# Altium PCB 5_step_seq.PcbDoc
Units mm, origin at the board's own origin, x right, y up, seen from the top; angles counter-clockwise.
Board outline 69.8 x 106.5 mm, 2 copper layers (Top Layer, Bottom Layer); 89 components, 66 nets, 253 pads, 244 vias.
Unrouted connection lines stored in the file: 39.
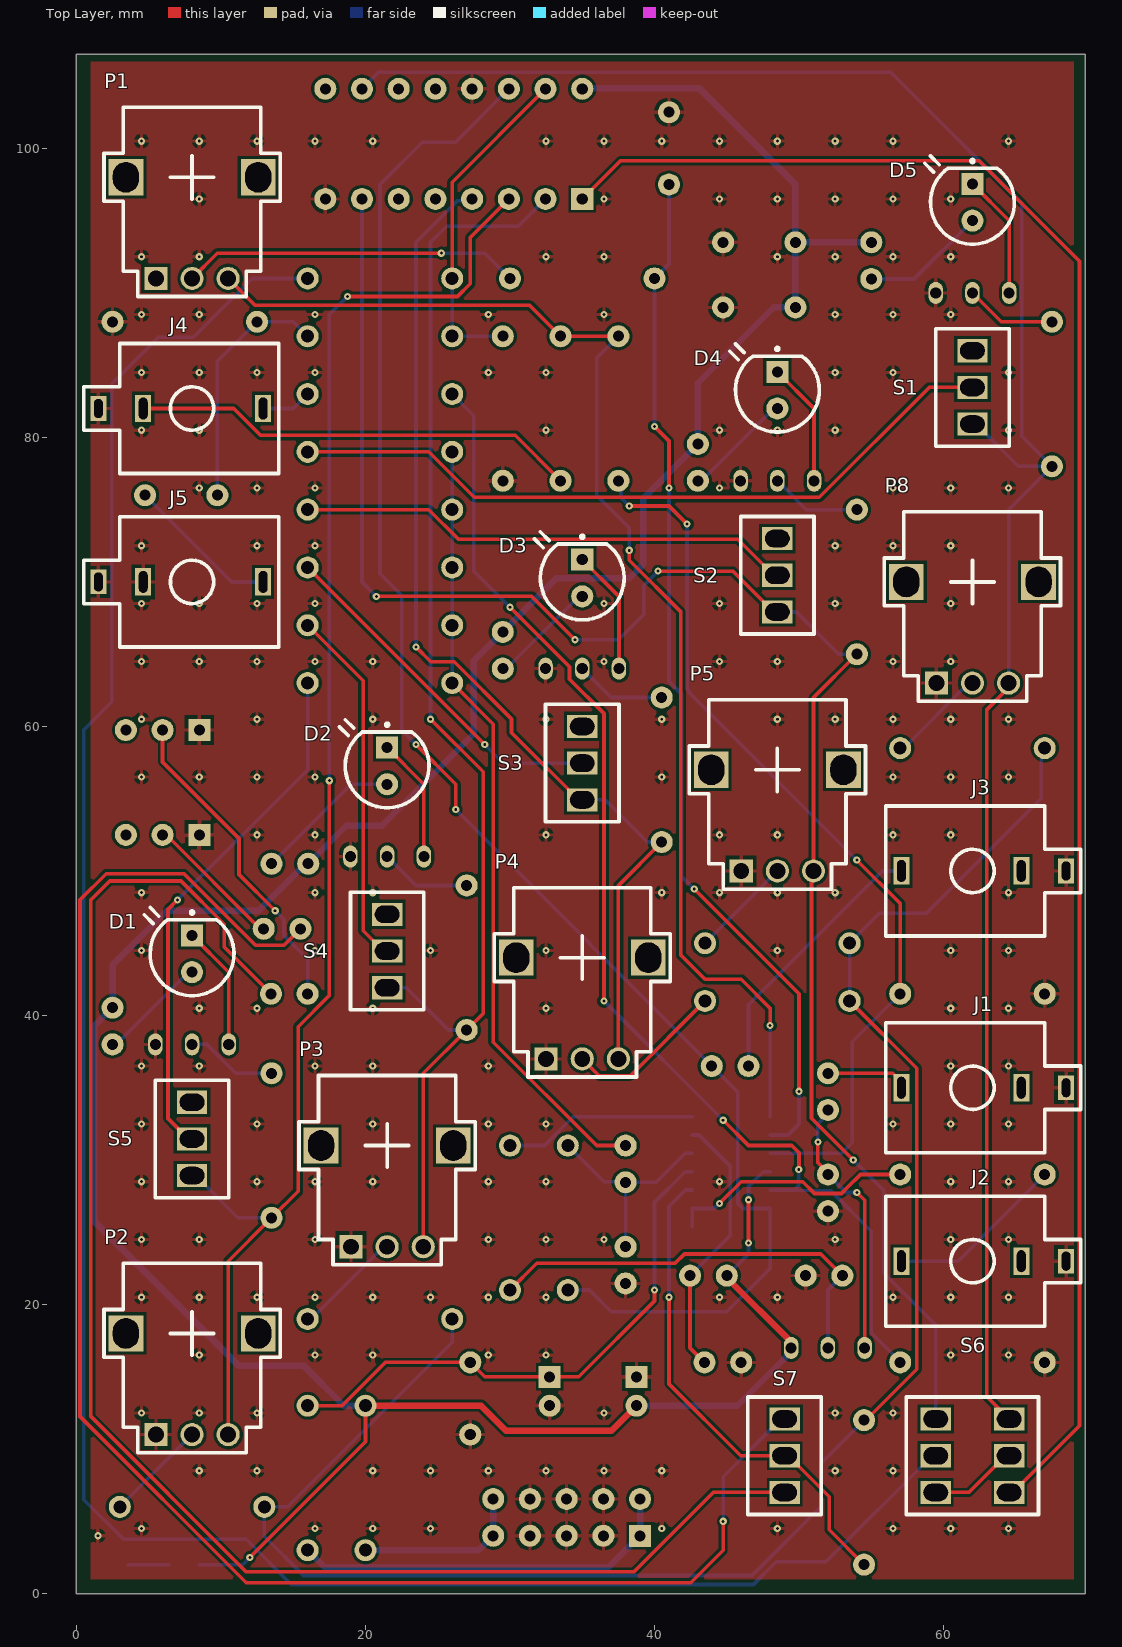
[diagram p0: Top Layer view]
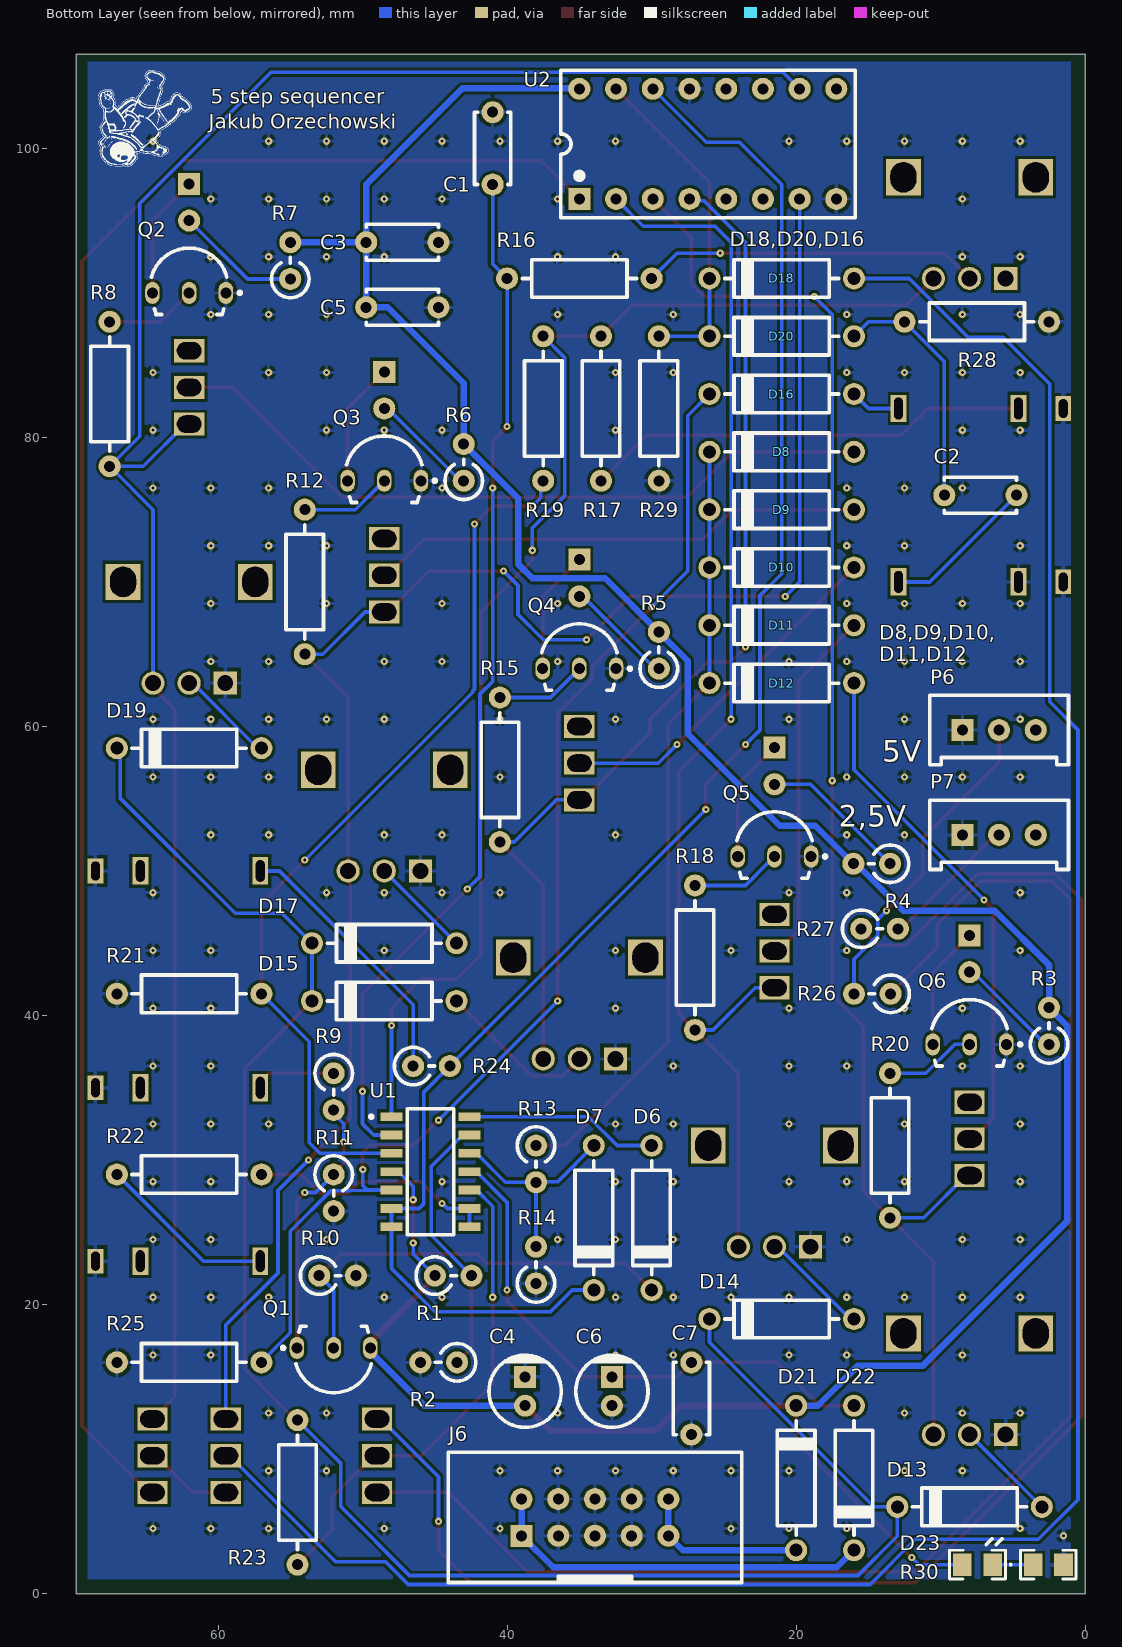
[diagram p1: Bottom Layer view, seen from below]
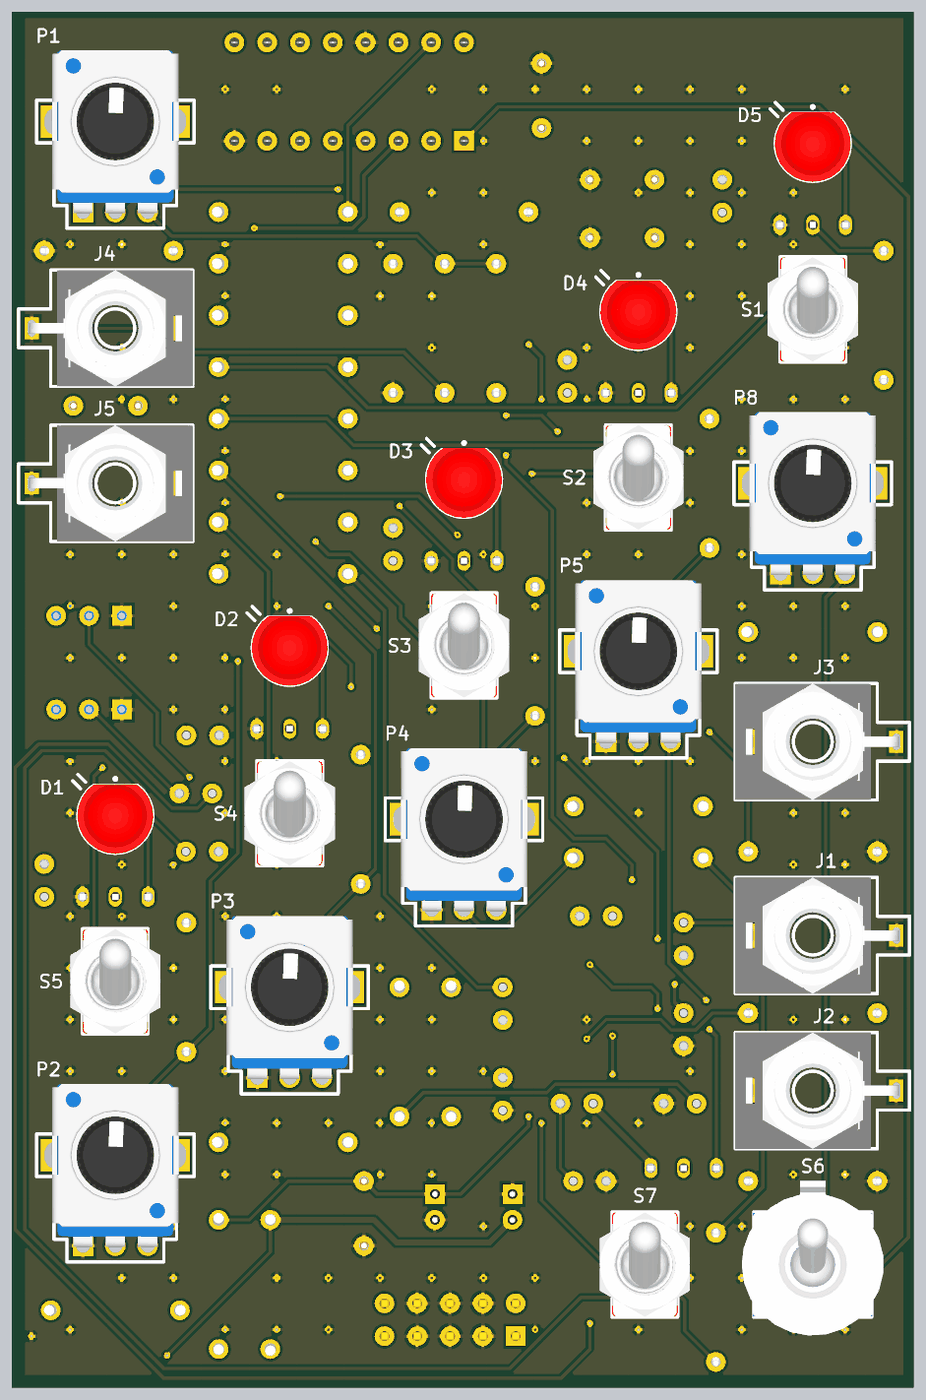
[diagram p2: 3D render of the assembled board from above, using the file's embedded part models]
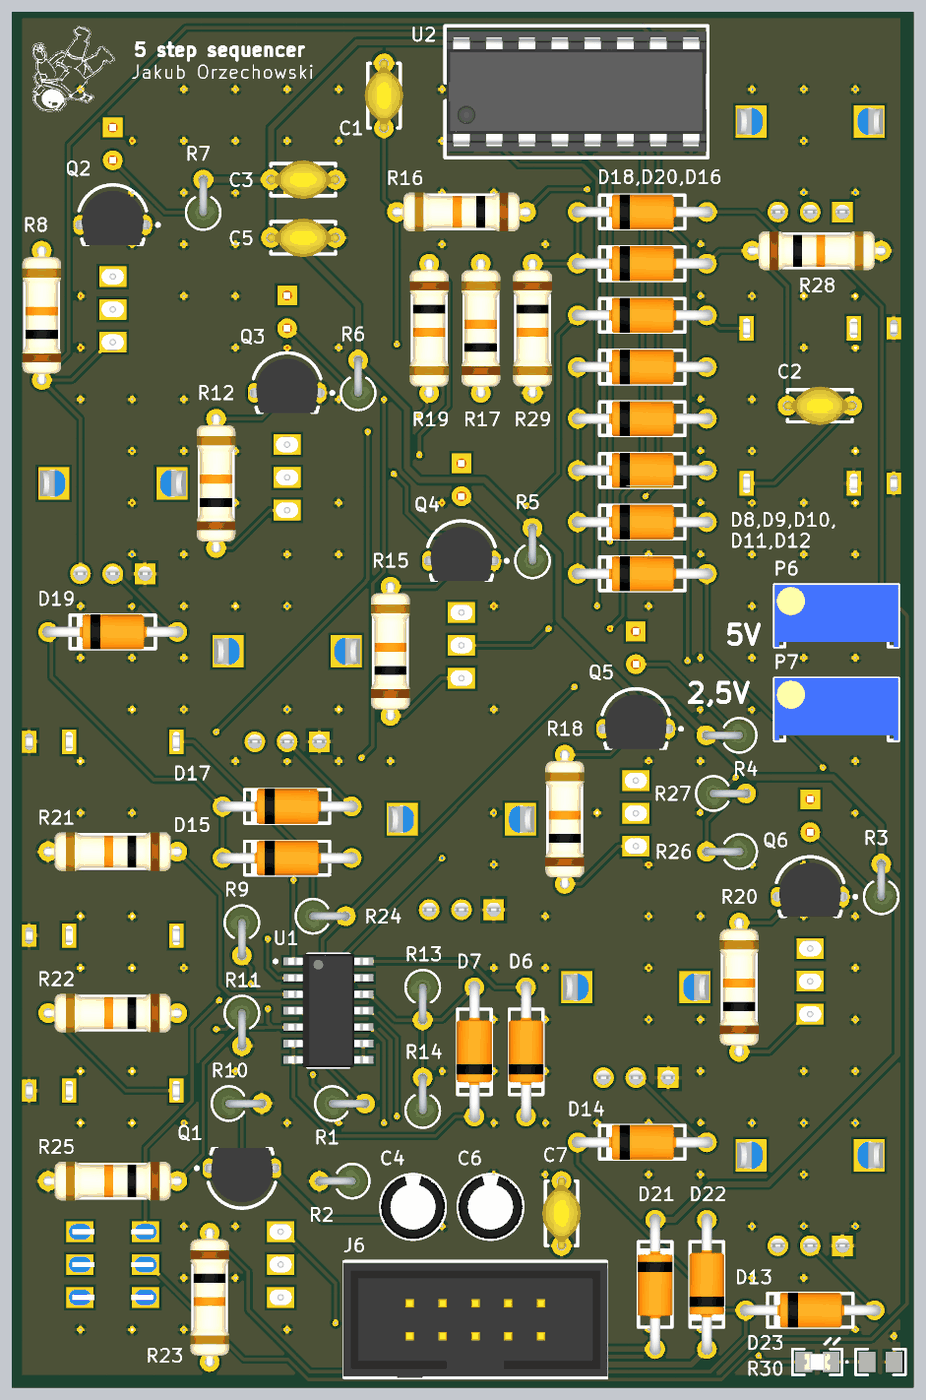
[diagram p3: 3D render of the assembled board from below, using the file's embedded part models]

## Layer stack, top to bottom
Top Solder: solder mask 0.0102, Solder Resist, Dk 3.5
Top Layer: signal copper 0.0356
Dielectric 1: dielectric 0.32, FR-4, Dk 4.8
Bottom Layer: signal copper 0.0356
Bottom Solder: solder mask 0.0102, Solder Resist, Dk 3.5

## Board outline
0,0 0,106.5 69.8,106.5 69.8,0

## Design rules (kind name [scope] priority, off if disabled: settings)
Clearance [All] p1: gap=0.2 ignorepadtopadclearanceinfootprint=FALSE except(0.25: Arc-Hole Track-Hole SMDPad-Hole THPad-Hole Via-Hole Fill-Hole Poly-Hole Region-Hole Text-Hole)
HoleSize [All] p1: absolutevalues=TRUE maxlimit=6.2 minlimit=0 maxpercent=80.000 minpercent=20.000
HoleToHoleClearance [All] p1: gap=0.3 allowstackedmicrovias=TRUE
MinimumSolderMaskSliver [All] p1: minsoldermaskwidth=0.2
PolygonConnect [All] p1: connectstyle=Relief reliefconductorwidth=0.254 reliefentries=4 polygonreliefangle="90 Angle" airgapwidth=0.254
RoutingVias [All] p1: holewidth=0.2 width=0.5 viastyle="Through Hole" minholewidth=0.15 minwidth=0.3 maxholewidth=0.711 maxwidth=1.27
SilkToSilkClearance [All] p1: silktosilkclearance=0.15
SilkToSolderMaskClearance [IsPad] p1: minsilkscreentomaskgap=0.1 clearancetoexposedcopper=TRUE
SolderMaskExpansion [All] p1: expansion=0.05 istentingtop=FALSE
SupplyNets "Schematic Supply Nets_2" [InNet('-12 V')] p1: voltage=0.000
SupplyNets "Schematic Supply Nets_1" [InNet('GND')] p2: voltage=0.000
SupplyNets "Schematic Supply Nets" [InNet('+12 V')] p3: voltage=0.000
Width [All] p1: maxlimit=0.5 minlimit=0.2 preferedwidth=0.254
25 further rules are at their usual default settings.

## Components (designator, comment, footprint, x,y, rotation, side; value= is the part's Value field where it differs from the comment)
C1 "CAP" "Cap THT 5mm" 41,102.5 r270 bottom value=1uF
C2 "CAP" "Cap THT 5mm" 4.75,76 r0 bottom value=1nF
C3 "CAP" "Cap THT 5mm" 44.75,93.5 r0 bottom value=100nF
C4 "CAP" "Cap electrolytic THT 5mm" 38.75,15 r270 bottom value=47uF
C5 "CAP" "Cap THT 5mm" 44.75,89 r0 bottom value=100nF
C6 "CAP" "Cap electrolytic THT 5mm" 32.75,15 r270 bottom value=47uF
C7 "CAP" "Cap THT 5mm" 27.25,16 r270 bottom value=100nF
D1 "LED" "LED THT 5 mm raised" 8,43 r90 top
D2 "LED" "LED THT 5 mm raised" 21.5,56 r90 top
D3 "LED" "LED THT 5 mm raised" 35,69 r90 top
D4 "LED" "LED THT 5 mm raised" 48.5,82 r90 top
D5 "LED" "LED THT 5 mm raised" 62,95 r90 top
D6 "DIODE" "Diode THT 10 mm" 30,31 r270 bottom
D7 "DIODE" "Diode THT 10 mm" 34,31 r270 bottom
D8 "DIODE" "Diode THT 10 mm" 16,79 r0 bottom
D9 "DIODE" "Diode THT 10 mm" 16,75 r0 bottom
D10 "DIODE" "Diode THT 10 mm" 16,71 r0 bottom
D11 "DIODE" "Diode THT 10 mm" 16,67 r0 bottom
D12 "DIODE" "Diode THT 10 mm" 16,63 r0 bottom
D13 "DIODE" "Diode THT 10 mm" 3,6 r0 bottom
D14 "DIODE" "Diode THT 10 mm" 16,19 r0 bottom
D15 "DIODE" "Diode THT 10 mm" 43.5,41 r0 bottom
D16 "DIODE" "Diode THT 10 mm" 16,83 r0 bottom
D17 "DIODE" "Diode THT 10 mm" 43.5,45 r0 bottom
D18 "DIODE" "Diode THT 10 mm" 16,91 r0 bottom
D19 "DIODE" "Diode THT 10 mm" 57,58.5 r0 bottom
D20 "DIODE" "Diode THT 10 mm" 16,87 r0 bottom
D21 "SCHOTTKY" "Diode THT 10 mm" 20,3 r90 bottom
D22 "SCHOTTKY" "Diode THT 10 mm" 16,13 r270 bottom
D23 "LED" "LED SMD 0805" 8.5,2 r180 bottom
J1 "JACK Mono" PJ301M 62,35 r90 top
J2 "JACK Mono" PJ301M 62,23 r90 top
J3 "JACK Mono" PJ301M 62,50 r90 top
J4 "JACK Mono" PJ301M 8,82 r270 top
J5 "JACK Mono" PJ301M 8,70 r270 top
J6 "IDC 10" "IDC 10 PIN" 39,4 r90 bottom
P1 "VR" "9 mm PCB Potentiometer" 8,98 r0 top value=B250k
P2 "Mono Pot" "9 mm PCB Potentiometer" 8,18 r0 top value=B100k
P3 "Mono Pot" "9 mm PCB Potentiometer" 21.5,31 r0 top value=B100k
P4 "Mono Pot" "9 mm PCB Potentiometer" 35,44 r0 top value=B100k
P5 "Mono Pot" "9 mm PCB Potentiometer" 48.5,57 r0 top value=B100k
P6 "VR" "Multiturn Potentiometer inline" 8.5,59.75 r180 bottom value=5k
P7 "VR" "Multiturn Potentiometer inline" 8.5,52.5 r180 bottom value=2k
P8 "Mono Pot" "9 mm PCB Potentiometer" 62,70 r0 top value=B100k
Q1 "BC547" "TO-92 wide" 49.46,17 r0 bottom
Q2 "BC547" "TO-92 wide" 64.54,90 r180 bottom
Q3 "BC547" "TO-92 wide" 51.04,77 r180 bottom
Q4 "BC547" "TO-92 wide" 37.54,64 r180 bottom
Q5 "BC547" "TO-92 wide" 24.04,51 r180 bottom
Q6 "BC547" "TO-92 wide" 10.54,38 r180 bottom
R1 "RES" "Resistor THT vertical" 45,22 r180 bottom value=100k
R2 "RES" "Resistor THT vertical" 43.46,16 r0 bottom value=47k
R3 "RES" "Resistor THT vertical" 2.5,38 r90 bottom value=1k
R4 "RES" "Resistor THT vertical" 13.5,50.5 r0 bottom value=1k
R5 "RES" "Resistor THT vertical" 29.5,64 r90 bottom value=1k
R6 "RES" "Resistor THT vertical" 43,77 r90 bottom value=1k
R7 "RES" "Resistor THT vertical" 55,90.96 r90 bottom value=1k
R8 "RES" "Resistor THT 10mm" 67.5,88 r270 bottom value=100k
R9 "RES" "Resistor THT vertical" 52,36 r270 bottom value=200r
R10 "RES" "Resistor THT vertical" 53,22 r180 bottom value=100k
R11 "RES" "Resistor THT vertical" 52,29 r270 bottom value=4k7
R12 "RES" "Resistor THT 10mm" 54,75 r270 bottom value=100k
R13 "RES" "Resistor THT vertical" 38,31 r270 bottom value=100k
R14 "RES" "Resistor THT vertical" 38,21.46 r90 bottom value=100k
R15 "RES" "Resistor THT 10mm" 40.5,62 r270 bottom value=100k
R16 "RES" "Resistor THT 10mm" 40,91 r180 bottom value=6k8
R17 "RES" "Resistor THT 10mm" 33.5,87 r270 bottom value=1k
R18 "RES" "Resistor THT 10mm" 27,49 r270 bottom value=100k
R19 "RES" "Resistor THT 10mm" 37.5,77 r90 bottom value=100k
R20 "RES" "Resistor THT 10mm" 13.5,36 r270 bottom value=100k
R21 "RES" "Resistor THT 10mm" 67,41.5 r180 bottom value=100k
R22 "RES" "Resistor THT 10mm" 67,29 r180 bottom value=1k
R23 "RES" "Resistor THT 10mm" 54.5,2 r90 bottom value=68k
R24 "RES" "Resistor THT vertical" 46.5,36.5 r180 bottom value=1k
R25 "RES" "Resistor THT 10mm" 67,16 r180 bottom value=100k
R26 "RES" "Resistor THT vertical" 13.46,41.5 r0 bottom value=51k
R27 "RES" "Resistor THT vertical" 15.5,46 r180 bottom value=18k
R28 "RES" "Resistor THT 10mm" 2.5,88 r0 bottom value=100k
R29 "RES" "Resistor THT 10mm" 29.5,77 r90 bottom value=100k
R30 "RES" "Resistor SMD 0805" 3.6,2 r180 bottom value=10k
S1 "SPDT" 2MS1T1B5M2RE 62,80.92 r180 top
S2 "SPDT" 2MS1T1B5M2RE 48.5,67.92 r180 top
S3 "SPDT" 2MS1T1B5M2RE 35,54.92 r180 top
S4 "SPDT" 2MS1T1B5M2RE 21.5,41.92 r180 top
S5 "SPDT" 2MS1T1B5M2RE 8,28.92 r180 top
S6 "DPDT" 2MD6T1B5M2RE 59.46,12.08 r0 top
S7 "SPDT" 2MS1T1B5M2RE 49,7 r180 top
U1 "TL074CDR" SOIC14 48,33 r180 bottom
U2 "CD4017BE" "DIP-16 socket" 35,96.5 r90 bottom

## Footprints (in the part's own frame and the unit in brackets; to place one, negate y for a bottom-side part, rotate by r counter-clockwise, add the part's x,y. Pads: shape width x height; smd on the part's side, far side on the other; paste and mask are expansions set on the pad)
2MD6T1B5M2RE [mm] "Dual Pole Dual Throw on-on-on Switch"
  rect 2.1x1.6 hole 1.2 slot 1.7 at 0 deg: 1(0,0) 2(0,-2.54) 3(0,-5.08) 4(5.08,0) 5(5.08,-2.54) 6(5.08,-5.08)
  silkscreen extent -2.03,-6.6 7.11,1.53, body extent -2.96,-8.04 8.03,3.93, height 4
2MS1T1B5M2RE [mm] "Single Pole Dual Throw on-on Switch"
  rect 2.1x1.6 hole 1.2 slot 1.7 at 0 deg: 1(0,0) 2(0,-2.54) 3(0,-5.08)
  silkscreen extent -2.54,-6.6 2.54,1.53, body extent -3.5,-6.59 3.5,1.51, height 21.54
"9 mm PCB Potentiometer" [mm] "Generic 9 mm shaft potentiometer PCB mount"
  rect 1.6x1.6 hole 1.1: 1(-2.5,-7)
  round 1.6 hole 1.1: 2(0,-7) 3(2.5,-7)
  rect 2.4x2.5 hole 1.8 slot 2.1 at 90 deg: 11(-4.575,0) 11(4.575,0)
  silkscreen extent -6.1,-8.25 6.1,4.85, body extent -5.66,-7.1 5.66,5.5, height 25
"Cap electrolytic THT 5mm" [mil] "THT electrolytic capacitor 5 mm diameter"
  rect 60x60 hole 30: 1(0,0)
  round 60 hole 30: 2(78.74,0)
  silkscreen extent -59,-98 138,98, body extent -59,-98 137,98, height 354
"Cap THT 5mm" [mil] "THT ceramic capacitor 5 mm pitch"
  round 60 hole 30: 1(0,0) 2(196.85,0)
  silkscreen extent 0,-49 197,49, body extent -11,-59 208,59, height 197
"Diode THT 10 mm" [mil] "THT axial diode 10 mm pitch"
  round 60 hole 35.43: 1(0,0) 2(393.7,0)
  silkscreen extent 41,-51 352,51, body extent -21,-53 411,53, height 107
"DIP-16 socket" [mil] "Socket for DIP-16 ICs"
  rect 60x60 hole 30: 1(0,0)
  round 60 hole 30: 2(0,-100) 3(0,-200) 4(0,-300) 5(0,-400) 6(0,-500) 7(0,-600) 8(0,-700) 9(300,-700) 10(300,-600) 11(300,-500) 12(300,-400) 13(300,-300) 14(300,-200) 15(300,-100) 16(300,0)
  silkscreen extent -51,-751 350,50, body extent -33,-747 333,45, height 294
"IDC 10 PIN" [mil] "10 PIN IDC Connector"
  rect 60x60 hole 30: 1(0,0)
  round 60 hole 30: 2(100,0) 3(0,-100) 4(100,-100) 5(0,-200) 6(100,-200) 7(0,-300) 8(100,-300) 9(0,-400) 10(100,-400)
  silkscreen extent -127,-600 227,200, body extent -127,-604 223,204, height 354
"LED SMD 0805" [mm] "SMD LED diode 0805 package"
  rect 1.3x1.55 smd: 1(0,0) 2(2.1,0)
  silkscreen extent -0.87,-1 3.36,1.8, body extent 0.05,-0.63 2.05,0.63, height 0.8
"LED THT 5 mm raised" [mil] "THT LED diode 5 mm diameter raised for panel mounting"
  round 60 hole 30: 1(0,0)
  rect 60x60 hole 30: 2(100,0)
  silkscreen extent -64,-114 176,130, body extent -66,-116 146,116, height 559
"Multiturn Potentiometer inline" [mil] "PCB mount inline multiturn trimmer pot with parameter label"
  rect 60x60 hole 30: 1(0,0)
  round 60 hole 30: 2(100,0) 3(200,0)
  silkscreen extent -89,-94 289,94, body extent -89,-95 289,95, height 454
PJ301M [mm] "3,5 mm Jack mono PCB Mount"
  rect 1.7x1.1 hole 0.6 slot 1.3 at 0 deg: 1(0,-6.48)
  rect 1.9x1.1 hole 0.6 slot 1.5 at 0 deg: 2(0,-3.38) 3(0,4.92)
  silkscreen extent -4.5,-7.5 4.5,6, body extent -4.5,-6.73 4.5,6, height 14
"Resistor SMD 0805" [mm] "SMD resistor 0805 package"
  rect 1.3x1.55 smd: 1(0,0) 2(2.1,0)
  silkscreen extent -0.87,-1 2.98,1, body extent -0.1,-0.72 2.2,0.72, height 0.7
"Resistor THT 10mm" [mil] "THT axial resistor 10 mm pitch"
  round 60 hole 30: 1(0,0) 2(393.7,0)
  silkscreen extent 41,-51 352,51, body extent -14,-59 407,59, height 122
"Resistor THT vertical" [mil] "THT axial resistor 10 mm pitch"
  round 60 hole 30: 1(0,0) 2(100,0)
  silkscreen extent -51,-51 59,51, body extent -49,-49 112,49, height 406
SOIC14 [mm] "SOIC14 SMD package"
  rect 1.55x0.6 smd: 1(0,0) 2(0,-1.27) 3(0,-2.54) 4(0,-3.81) 5(0,-5.08) 6(0,-6.35) 7(0,-7.62) 8(5.4,-7.62) 9(5.4,-6.35) 10(5.4,-5.08) 11(5.4,-3.81) 12(5.4,-2.54) 13(5.4,-1.27) 14(5.4,0)
  silkscreen extent -1.5,-8.17 4.3,0.55, body extent -0.4,-8.19 5.8,0.57, height 1.75
"TO-92 wide" [mil] "TO-92 THT package wide legs"
  oval 39.37x60 hole 30: 1(0,0) 2(100,0) 3(200,0)
  silkscreen extent -3,-59 242,122, body extent -9,-61 209,104, height 323

## Part data
C1 C2 C3 C5 C7: library part "Capacitor THT 5mm", "THT Capacitor Non-Polarised 5 mm Pitch", Package Type=THT
C4 C6: library part "Capacitor Electr THT 5mm", "THT Electrolytic Capacitor 5 mm Diameter", Package Type=THT, Voltage rating=16V
D1 D2 D3 D4 D5: library part "LED THT", "THT LED Diode 5 mm Diameter", Color=RED, Package Type=THT, Type=LED
D6 D7 D8 D9 D10 D11 D12 D13 D14 D15 D16 D17 D18 D19 D20: library part "Diode THT", "Generic THT Axial Diode 10 mm Pitch", Package Type=THT, Model=1N4148, Type=Diode
D21 D22: library part "Schottky Diode THT", "Generic THT Axial Schottky Diode 10 mm Pitch", Package Type=THT, Model=1N5819, Type=Schottky
D23: library part "LED SMD", "SMD LED Diode 0805 Package", Color=GREEN, Package Type=SMD, Type=LED
J1 J2 J3 J4 J5: library part PJ301M, "PJ301M Eurorack 3,5 mm Patch Socket PCB Mount", Package Type=THT
  J1: Label="GATE out"
  J2: Label="CV out"
  J3: Label="CLK out"
  J4: Label="CLK in"
  J5: Label="RESET in"
J6: library part "IDC 10 pin", "10 Pin IDC Connector"
P1: library part "VR B 9 mm", "PCB Mount 9mm Mono Potentiometer THT as Variable Resistor Clockwise Decrease", Package Type=THT, Parameter=RATE, Type=Potentiometer
P2 P3 P4 P5 P8: library part "Potentiometer 9 mm", "PCB Mount 9mm Mono Potentiometer THT", Package Type=THT, Type=Potentiometer
  P2: Parameter="STEP 1"
  P3: Parameter="STEP 2"
  P4: Parameter="STEP 3"
  P5: Parameter="STEP 4"
  P8: Parameter="STEP 5"
P6 P7: library part "VR A Multiturn THT", "PCB Mount Multiturn Trimmer Potentiometer Top Adjustable as Variable Resistor Clockwise Increase", Package Type=THT, Type=Potentiometer
Q1 Q2 Q3 Q4 Q5 Q6: "BC547 NPN Transistor THT TO-92 Package", Package=TO-92, Package Type=THT, Type="NPN Transistor"
R1 R2 R3 R4 R5 R6 R7 R8 R9 R10 R11 R12 R13 R14 R15 R16 R17 R18 R19 R20 R21 R22 R23 R24 R25 R26 R27 R28 R29: library part "Resistor THT", "THT Axial Resistor 10mm Pitch", Package Type=THT
R30: library part "Resistor SMD 0805", "SMD Resistor 0805 package", Package Type=SMD
S1 S2 S3 S4 S5 S7: library part "2MS1T1B5M2RE SPDT (Eurorack)", "Single Pole Double Throw on-on Switch", Package Type=THT, Type=Switch
  S1: Signals="GATE 5"
  S2: Signals="GATE 4"
  S3: Signals="GATE 3"
  S4: Signals="GATE 2"
  S5: Signals="GATE 1"
  S7: Signals="OUT RANGE"
S6: library part "2MD6T1B5M2RE DPDT (Eurorack)", "Dual Pole Dual Throw on-on-on Switch", Package Type=THT, Signals="STEP COUNT", Type=Switch
U1: library part "TL074CDR SOIC14", "TL074CDR Quad Op-Amp SOIC14 Package", Package=SOIC14, Package Type=SMD, Type="Op Amp"
U2: library part "CD4017BE DIP-16", "CD4017BE CMOS Decade Counter DIP-16 Package", Package=DIP-16, Package Type=THT, Type=Counter

## Via types
v1: diameter 0.5, hole 0.2, Top Layer to Bottom Layer, 244 vias

## Nets (pads, with @x,y where several pads share a name; then routed paths per layer and width w, separated by ;. In a path a pad name is that pad's centre, name@x,y a point inside that pad or via, vN(x,y) a via of type N, cw(c..) or ccw(c..) an arc to the next point about the centre after c; other vN are vias at no path point)
2,5V: R27.1 S7.3 | length 115.5
  Top Layer w0.254: R27.1 14.357,44.857 12.398,44.857 7.441,49.814 2.064,49.814 0.25,48 0.25,12.25 11.75,0.75 42.5,0.75 44.75,3 v1(44.75,5)
  Bottom Layer w0.254: v1(44.75,5) 44.75,8.08 48.75,12.08 S7.3
"3 st": P5.3 R12.2 S2.1 S6.1 U2.7 | length 125.7
  Top Layer w0.254: v1(20.75,69) 31.5,69 v1(34.5,66) ; v1(40.25,70.75) 45.42,70.75 48.25,67.92 S2.1 ; v1(53.75,30) 50.857,32.893 50.857,49.857 P5.3 51,62 R12.2
  Bottom Layer w0.254: U2.7 19.76,69.99 v1(20.75,69) ; v1(34.5,66) 37.5,66 39.25,67.75 39.25,69.75 v1(40.25,70.75) ; S2.1 49.83,67.92 52.75,65 R12.2 ; v1(53.75,30) 55.857,27.893 55.857,22.184 59.46,18.581 S6.1
"4 st": P8.3 R8.2 S1.1 S6.4 U2.10 | length 144.1
  Top Layer w0.254: P8.3 64.5,62.678 63,61.178 63,13.62 S6.4
  Bottom Layer w0.254: U2.10 20.903,105.263 56.34,105.263 65.421,96.182 65.421,80.079 R8.2 ; S1.1 62.25,80.92 65.17,78 R8.2 ; P8.3 64.5,75 R8.2
"5 st": S6.6 U2.1 | length 125.7
  Top Layer w0.254: U2.1 37.643,99.143 62.46,99.143 69.411,92.192 69.411,11.621 64.79,7 S6.6
5V: R26.1 S7.1 | length 107.6
  Top Layer w0.254: R26.1 10.224,44.736 10.224,46.313 7.23,49.306 2.306,49.306 1,48 1,12.25 11.75,1.5 38.563,1.5 44.063,7 S7.1
"+12 V": C3.2 C4.2 C5.2 D21.2 D23.1 Q1.1 R1.1 R3.2 R4.2 R5.2 R6.2 R7.2 U1.4 U2.16 | length 213.5
  Top Layer w0.254: v1(12,2.5) 20,10.5 D21.2 ; v1(46.5,24.25) v1(46.5,27.25)
  Top Layer w0.45: D21.2 28,13 29.75,11.25 37,11.25 C4.2 ; R1.1 45,21.861 49.46,17.401 Q1.1
  Bottom Layer w0.254: D23.1 11.5,2 v1(12,2.5) ; R1.1 46.5,23.5 v1(46.5,24.25) ; v1(46.5,27.25) 46.5,28.165 47.525,29.19 U1.4
  Bottom Layer w0.45: D21.2 18.5,13 15.75,15.75 11.25,15.75 1.25,25.75 1.25,39.29 R3.2 2.5,43.5 6.25,47.25 12.594,47.25 15.844,50.5 R4.2 18.675,53.135 21.135,53.135 27.5,59.5 27.5,64.54 R5.2 33.21,70.25 38.25,70.25 39.211,71.211 39.211,75.751 R6.2 43,83.75 48.25,89 C5.2 C3.2 ; U2.16 35.023,104.143 43.107,104.143 49.75,97.5 C3.2 ; C4.2 45.722,13 49.46,16.738 Q1.1 ; R7.2 C3.2
"-12 V": C6.1 C7.1 D22.1 U1.11 | length 38.1
  Top Layer w0.254: D22.1 18.384,13 21.384,16 C7.1 28.25,15 C6.1 34.75,15 40,20.25 v1(40,21)
  Bottom Layer w0.254: v1(40,21) 40,27.065 42.125,29.19 U1.11
"CLK buf": D7.2 R24.2 U1.6 U1.7 U2.14 | length 114.8
  Top Layer w0.254: v1(23.5,58.75) 26.25,56 v1(26.25,54.25)
  Bottom Layer w0.254: v1(23.5,58.75) 22.502,59.748 22.502,69.066 21,70.569 21,97.5 23.925,100.425 26.225,100.425 U2.14 ; v1(26.25,54.25) 35.5,45 35.5,44.96 R24.2 45.758,34.702 45.758,26.992 46.1,26.65 U1.6 U1.7 48,22.5 45,19.5 37,19.5 35.5,21 D7.2
"CV out": J2.3 R22.1 | length 12.4
  Bottom Layer w0.254: J2.3 61,23 R22.1
"G1 on": P2.3 R20.2 S5.1 U2.3 | length 104.7
  Top Layer w0.254: P2.3 10.5,23 R20.2 15.344,27.844 15.344,39.228 17.5,41.384 v1(17.5,56.25) ; v1(18.75,89.75) 26.366,89.75 27.25,90.634 27.25,93.83 U2.3
  Bottom Layer w0.254: S5.1 8.25,28.92 11.17,26 R20.2 ; v1(17.5,56.25) 17.5,88.5 v1(18.75,89.75)
"G2 on": P3.3 R18.2 S4.1 U2.2 | length 88.6
  Top Layer w0.254: P3.3 24,36 R18.2 28.143,40.143 28.143,56.857 v1(24.5,60.5)
  Bottom Layer w0.254: S4.1 22.83,41.92 25.75,39 R18.2 ; v1(24.5,60.5) 24.5,93.5 25.619,94.619 30.579,94.619 U2.2
"G3 on": P4.3 R15.2 S3.1 U2.4 | length 72.5
  Top Layer w0.254: v1(23.5,65.5) 24.522,64.478 26.139,64.478 30.108,60.508 30.108,59.562 34.75,54.92 S3.1 ; P4.3 37.5,49 R15.2
  Bottom Layer w0.254: v1(23.5,65.5) 23.5,93.5 26.386,96.386 27.266,96.386 U2.4 ; S3.1 36.58,54.92 39.5,52 R15.2
"GATE out": J1.3 R9.1 | length 5.7
  Top Layer w0.254: R9.1 56.48,36 57.08,35.4 J1.3
GND: C1.1 C3.1 C4.1 C5.1 C6.2 C7.2 J1.1 J2.1 J3.1 J4.1 J5.1 J5.2 J6.3 J6.4 J6.5 J6.6 J6.7 J6.8 P2.1 P3.1 P4.1 P5.1 P6.1 P7.1 P8.1 Q2.3 Q3.3 Q4.3 Q5.3 Q6.3 R2.2 R10.2 R11.2 R14.1 R21.1 R25.1 R28.1 R29.1 R30.2 U2.8 U2.13
  other v1: 1.5,4 4.5,4.5 16.5,4.5 20.5,4.5 24.5,4.5 40.5,4.5 48.5,4.5 56.5,4.5 60.5,4.5 64.5,4.5 8.5,8.5 12.5,8.5 20.5,8.5 24.5,8.5 28.5,8.5 32.5,8.5 36.5,8.5 40.5,8.5 52.5,8.5 56.5,8.5 4.5,12.5 8.5,12.5 12.5,12.5 36.5,12.5 52.5,12.5 56.5,12.5 8.5,16.5 16.5,16.5 20.5,16.5 28.5,16.5 32.5,16.5 60.5,16.5 64.5,16.5 4.5,20.5 8.5,20.5 12.5,20.5 16.5,20.5 20.5,20.5 24.5,20.5 28.5,20.5 32.5,20.5 44.5,20.5 48.5,20.5 56.5,20.5 60.5,20.5 64.5,20.5 4.5,24.5 8.5,24.5 16.5,24.5 28.5,24.5 32.5,24.5 36.5,24.5 52.5,24.5 60.5,24.5 64.5,24.5 4.5,28.5 12.5,28.5 16.5,28.5 20.5,28.5 28.5,28.5 32.5,28.5 44.5,28.5 60.5,28.5 64.5,28.5 4.5,32.5 12.5,32.5 20.5,32.5 28.5,32.5 32.5,32.5 56.5,32.5 60.5,32.5 64.5,32.5 4.5,36.5 8.5,36.5 16.5,36.5 20.5,36.5 28.5,36.5 60.5,36.5 64.5,36.5 8.5,40.5 12.5,40.5 20.5,40.5 32.5,40.5 60.5,40.5 64.5,40.5 4.5,44.5 16.5,44.5 24.5,44.5 32.5,44.5 48.5,44.5 60.5,44.5 64.5,44.5 4.5,48.5 16.5,48.5 20.5,48.5 40.5,48.5 44.5,48.5 48.5,48.5 52.5,48.5 64.5,48.5 12.5,52.5 16.5,52.5 32.5,52.5 44.5,52.5 48.5,52.5 56.5,52.5 60.5,52.5 4.5,56.5 8.5,56.5 12.5,56.5 16.5,56.5 40.5,56.5 56.5,56.5 60.5,56.5 64.5,56.5 4.5,60.5 12.5,60.5 20.5,60.5 32.5,60.5 40.5,60.5 48.5,60.5 52.5,60.5 56.5,60.5 60.5,60.5 64.5,60.5 4.5,64.5 8.5,64.5 12.5,64.5 16.5,64.5 20.5,64.5 36.5,64.5 44.5,64.5 48.5,64.5 56.5,64.5 60.5,64.5 4.5,68.5 8.5,68.5 12.5,68.5 16.5,68.5 36.5,68.5 44.5,68.5 52.5,68.5 60.5,68.5 4.5,72.5 12.5,72.5 16.5,72.5 52.5,72.5 56.5,72.5 60.5,72.5 8.5,76.5 12.5,76.5 16.5,76.5 44.5,76.5 56.5,76.5 60.5,76.5 64.5,76.5 4.5,80.5 8.5,80.5 32.5,80.5 44.5,80.5 48.5,80.5 52.5,80.5 64.5,80.5 4.5,84.5 8.5,84.5 12.5,84.5 16.5,84.5 28.5,84.5 32.5,84.5 52.5,84.5 56.5,84.5 64.5,84.5 4.5,88.5 8.5,88.5 16.5,88.5 28.5,88.5 36.5,88.5 52.5,88.5 56.5,88.5 60.5,88.5 4.5,92.5 8.5,92.5 32.5,92.5 36.5,92.5 48.5,92.5 52.5,92.5 56.5,92.5 60.5,92.5 8.5,96.5 36.5,96.5 44.5,96.5 48.5,96.5 52.5,96.5 56.5,96.5 60.5,96.5 4.5,100.5 8.5,100.5 12.5,100.5 16.5,100.5 20.5,100.5 32.5,100.5 36.5,100.5 40.5,100.5 44.5,100.5 48.5,100.5 52.5,100.5 56.5,100.5 64.5,100.5
NetC1_2: C1.2 R16.1 U1.2 | length 71.9
  Top Layer w0.254: v1(40,80.75) 41,79.75 v1(41,76.5) ; v1(42.75,48.75) 50,41.5 v1(50,34.75)
  Bottom Layer w0.254: v1(40,80.75) R16.1 41,92 C1.2 ; v1(41,76.5) 41,63.116 41.875,62.241 41.875,49.625 v1(42.75,48.75) ; U1.2 49.23,31.73 50,32.5 v1(50,34.75)
NetC2_1: C2.1 J5.3 | length 10.7
  Bottom Layer w0.254: C2.1 10.75,70 J5.3
NetC2_2: C2.2 D20.1 R28.2 | length 17.1
  Bottom Layer w0.254: C2.2 9.75,85.25 R28.2 15,88 D20.1
NetD1_1: D1.1 R3.1 | length 7.6
  Bottom Layer w0.254: R3.1 2.75,38 7.75,43 D1.1
NetD1_2: D1.2 Q6.1 | length 8.6
  Top Layer w0.254: D1.2 10.54,43 Q6.1
NetD2_1: D2.1 R4.1 | length 10.3
  Bottom Layer w0.254: R4.1 19,56 D2.1
NetD2_2: D2.2 Q5.1 | length 8.6
  Top Layer w0.254: D2.2 24.04,56 Q5.1
NetD3_1: D3.1 R5.1 | length 7.6
  Bottom Layer w0.254: R5.1 29.75,64 34.75,69 D3.1
NetD3_2: D3.2 Q4.1 | length 8.6
  Top Layer w0.254: D3.2 37.54,69 Q4.1
NetD4_1: D4.1 R6.1 | length 7.6
  Bottom Layer w0.254: R6.1 43.25,77 48.25,82 D4.1
NetD4_2: D4.2 Q3.1 | length 8.6
  Top Layer w0.254: D4.2 51.04,82 Q3.1
NetD5_1: D5.1 R7.1 | length 8.7
  Bottom Layer w0.254: R7.1 57.96,90.96 D5.1
NetD5_2: D5.2 Q2.1 | length 8.6
  Top Layer w0.254: D5.2 64.54,95 Q2.1
NetD6_1: D6.1 U1.14 | length 13.4
  Bottom Layer w0.254: D6.1 32.384,31 34.384,33 U1.14
NetD6_2: D6.2 Q1.2 R10.1 | length 30.1
  Top Layer w0.254: D6.2 31.857,22.857 41.424,22.857 42.067,23.5 51.5,23.5 R10.1
  Bottom Layer w0.254: Q1.2 52,21 R10.1
NetD7_1: D7.1 R13.2 R14.2 U1.12 | length 14.9
  Bottom Layer w0.254: D7.1 36.513,28.487 37.973,28.487 R13.2 ; R14.2 R13.2 ; U1.12 42.125,30.46 40.125,28.46 R13.2
NetD8_1: D8.1 S1.2 | length 50.5
  Top Layer w0.254: D8.1 24.384,79 27.527,75.857 51.405,75.857 59.008,83.46 S1.2
NetD8_2: D8.2 D9.2 D10.2 D11.2 D12.2 R13.1 | length 54.1
  Top Layer w0.254: D12.2 28.844,60.156 28.844,38.156 36,31 R13.1
  Bottom Layer w0.254: D12.2 D11.2 D10.2 D9.2 D8.2
NetD9_1: D9.1 S2.2 | length 34.4
  Top Layer w0.254: D9.1 24.384,75 26.439,72.945 45.765,72.945 48.25,70.46 S2.2
NetD10_1: D10.1 S3.2 | length 24.6
  Top Layer w0.254: D10.1 v1(28.25,58.75)
  Bottom Layer w0.254: v1(28.25,58.75) 29.54,57.46 S3.2
NetD11_1: D11.1 S4.2 | length 25
  Top Layer w0.254: D11.1 19.841,63.159 19.841,45.869 21.25,44.46 S4.2
NetD12_1: D12.1 S5.2 | length 36.4
  Top Layer w0.254: v1(7,48) 6.341,47.341 6.341,32.869 7.75,31.46 S5.2
  Bottom Layer w0.254: v1(7,48) 16,57 D12.1
NetD13_1: D13.1 P2.2 | length 7.1
  Bottom Layer w0.254: D13.1 P2.2
NetD13_2: D13.2 D14.2 D15.2 D17.2 D19.2 R23.2 | length 127.7
  Top Layer w0.254: D15.2 58.143,36.357 58.143,15.527 54.616,12 R23.2
  Bottom Layer w0.254: D14.2 26,17.384 14.616,6 D13.2 13,3.963 15.713,1.25 46.75,1.25 51.5,6 51.5,9 R23.2 ; D15.2 D17.2 55.568,47.068 58.818,47.068 66.757,55.007 66.757,58.257 D19.2
NetD14_1: D14.1 P3.2 | length 7.6
  Top Layer w0.254: D14.1 D14.1@16.25,19 ; P3.2@21.25,24 P3.2
  Bottom Layer w0.254: D14.1@16.25,19 P3.2@21.25,24
NetD15_1: D15.1 P4.2 | length 11.1
  Top Layer w0.254: P4.2 36.181,35.819 38.319,35.819 D15.1
NetD16_1: D16.1 J4.3 | length 3.5
  Bottom Layer w0.254: J4.3 15,82 D16.1
NetD16_2: D16.2 R25.2 U1.5 | length 86.4
  Top Layer w0.254: v1(30,68.25) 34.119,64.131 34.119,63.27 36.5,60.889 v1(36.5,41) ; v1(44.75,32.75) 46.5,31 49.5,31 50,30.5 50,29.36 v1(49.984,29.344)
  Bottom Layer w0.254: D16.2 27.5,81.5 27.5,70.75 v1(30,68.25) ; v1(36.5,41) v1(44.75,32.75) ; U1.5@48.475,27.92 U1.5 U1.5@48.56,27.92 ; v1(49.984,29.344) 49.984,28.234 49.67,27.92 48.648,27.92 49.67,27.901 51.978,27.857 ccw(c52,29) 52,27.857 52.219,27.857 55,25.076 55,18.048 57,16.048 R25.2
NetD17_1: D17.1 P5.2 | length 7.1
  Bottom Layer w0.254: D17.1 P5.2
NetD18_1: D18.1 S6.2 | length 159.7
  Bottom Layer w0.254: D18.1 12.17,91 8.103,86.932 5.682,86.932 2.451,83.701 2.451,61.701 0.5,59.75 0.5,6.5 3.25,3.75 11.75,3.75 14.872,0.628 46.846,0.628 48.416,2.197 51.867,2.197 59.21,9.54 S6.2
NetD18_2: D18.2 D20.2 R29.2 U2.15 | length 23.3
  Top Layer w0.254: D18.2 26,97.66 U2.15
  Bottom Layer w0.254: D18.2 D20.2 R29.2
NetD19_1: D19.1 P8.2 | length 6.9
  Bottom Layer w0.254: D19.1 57.25,58.5 61.75,63 P8.2
NetD21_1: D21.1 J6.9 J6.10 | length 11.8
  Bottom Layer w0.45: D21.1 27.84,3 J6.9 J6.10
NetD22_2: D22.2 J6.1 J6.2 | length 26.9
  Bottom Layer w0.45: D22.2 17.187,1.813 36.813,1.813 J6.1 J6.2
NetD23_2: D23.2 R30.1 | length 2.8
  Bottom Layer w0.254: R30.1 D23.2
NetJ3_3: J3.3 R24.1 | length 18.7
  Bottom Layer w0.254: R24.1 46.5,40.75 55.75,50 J3.3
NetJ4_2: J4.2 R17.2 | length 31
  Top Layer w0.254: J4.2 10.881,82 12.738,80.143 30.357,80.143 R17.2
NetP1_2: P1.2 R16.2 | length 23.4
  Top Layer w0.254: P1.2 9.75,92.75 v1(25.25,92.75)
  Bottom Layer w0.254: v1(25.25,92.75) 28.25,92.75 R16.2
NetP1_3: P1.3 R17.1 R19.2 U1.1 | length 89.7
  Top Layer w0.254: P1.3 12.357,89.143 31.357,89.143 R17.1 R19.2 ; v1(38.255,72.185) 38.255,71.495 41.827,67.923 41.827,44.173 43.5,42.5 46,42.5 48,40.5 v1(48,39.309)
  Bottom Layer w0.254: R19.2 36,85.5 36,75.983 38.255,73.728 v1(38.255,72.185) ; U1.1 v1@48,39.308
NetP6_2: P6.2 R26.2 | length 22.4
  Top Layer w0.254: P6.2 5.96,57.54 11.25,52.25 11.25,49.75 v1(13.75,47.25)
  Bottom Layer w0.254: v1(13.75,47.25) 14.357,46.643 14.357,45.527 16,43.884 R26.2
NetP7_2: P7.2 R27.2 | length 9.7
  Top Layer w0.254: P7.2 6.21,52.5 12.71,46 R27.2
NetQ1_3: Q1.3 R9.2 R11.1 | length 18.5
  Top Layer w0.254: v1(51.305,31.246) 51.305,29.811 52,29.116 R11.1 ; v1(54,27.75) 54.54,27.21 Q1.3
  Bottom Layer w0.254: v1(51.305,31.246) 51.305,32.501 52,33.196 R9.2 ; R11.1 53.25,27.75 v1(54,27.75)
NetQ2_2: Q2.2 R8.1 | length 6.4
  Top Layer w0.254: Q2.2 62,89.94 62.345,89.595 62.405,89.595 64,88 R8.1
NetQ3_2: Q3.2 R12.1 | length 6.4
  Bottom Layer w0.254: Q3.2 48.5,76.94 48.845,76.595 48.905,76.595 50.5,75 R12.1
NetQ4_2: Q4.2 R15.1 | length 6.4
  Bottom Layer w0.254: Q4.2 35,63.94 35.345,63.595 35.405,63.595 37,62 R15.1
NetQ5_2: Q5.2 R18.1 | length 6.4
  Bottom Layer w0.254: Q5.2 21.5,50.94 21.845,50.595 21.905,50.595 23.5,49 R18.1
NetQ6_2: Q6.2 R20.1 | length 6.3
  Bottom Layer w0.254: Q6.2 9.032,38 11.032,36 R20.1
NetR1_2: R1.2 R2.1 U1.13 | length 18.7
  Top Layer w0.254: R1.2 42.46,17 R2.1
  Bottom Layer w0.254: R1.2 45.25,24.79 45.25,29.555 43.075,31.73 U1.13
NetR19_1: R19.1 R21.2 U1.3 | length 62.9
  Top Layer w0.254: v1(38.25,75.25) 41,75.25 v1(42.25,74) ; v1(54,50.75) 57,47.75 R21.2
  Bottom Layer w0.254: R19.1 37.679,76.821 37.679,75.821 v1(38.25,75.25) ; v1(42.25,74) 42.25,62.585 42.383,62.452 42.383,62.367 v1(54,50.75) ; U1.3 52.96,30.46 53.687,31.187 53.687,38.187 R21.2
NetR22_2: R22.2 U1.8 U1.9 | length 17.3
  Top Layer w0.254: v1(44.5,27) 46,28.5 50.25,28.5 51.067,27.683 52.31,27.683 52.933,27.683 53.374,28.124 ; 53.375,28.125 54.25,29 R22.2
  Bottom Layer w0.254: U1.8 U1.9 44.124,26.65 44.474,27 v1(44.5,27)
NetR23_1: R23.1 S7.2 U1.10 | length 34.4
  Top Layer w0.254: v1(41,20.5) 41,14.5 45.96,9.54 S7.2 49.25,9.54 52.09,6.7 52.09,4.41 R23.1
  Bottom Layer w0.254: v1(41,20.5) 41,26.795 42.125,27.92 U1.10
NetS6_3: S6.3 S6.5 | length 6.1
  Top Layer w0.254: S6.3 61.75,7 64.29,9.54 S6.5
pads on no net: J1.2 J2.2 J3.2 P1.1 P1.11 P2.11 P3.11 P4.11 P5.11 P6.3 P7.3 P8.11 S1.3 S2.3 S3.3 S4.3 S5.3 U2.5 U2.6 U2.9 U2.11 U2.12

## Polygon pours and split planes (outlines as drawn)
GND on Bottom Layer "NONET_L01_P-001" (solid, pour order 0): 1,106 1,1 69,1 69,106
GND on Top Layer "NONET_L01_P-001" (solid, pour order 1): 1,106 1,1 69,1 69,106

## Silkscreen, mask and mechanical layers (free items; w line width, h text height)
Bottom Overlay:
  drawing of 11 lines, arcs and shapes, not listed
  text "5 step sequencer" at 60.5,103.083 h1
  text "Jakub Orzechowski" at 60.65,101.35 h1
  text "D18,D20,D16" at 24.6,93.233 h1
  text "D8,D9,D10, / D11,D12" at 14.25,64.5 h1
  text "5V" at 14.049,57.55 h1.5
  text "2,5V" at 17.048,53.05 h1.5
Mechanical 1:
  the board outline again, w0.254